# EAGLE board robot_board (EAGLE 6.5.0), part 1 of 2
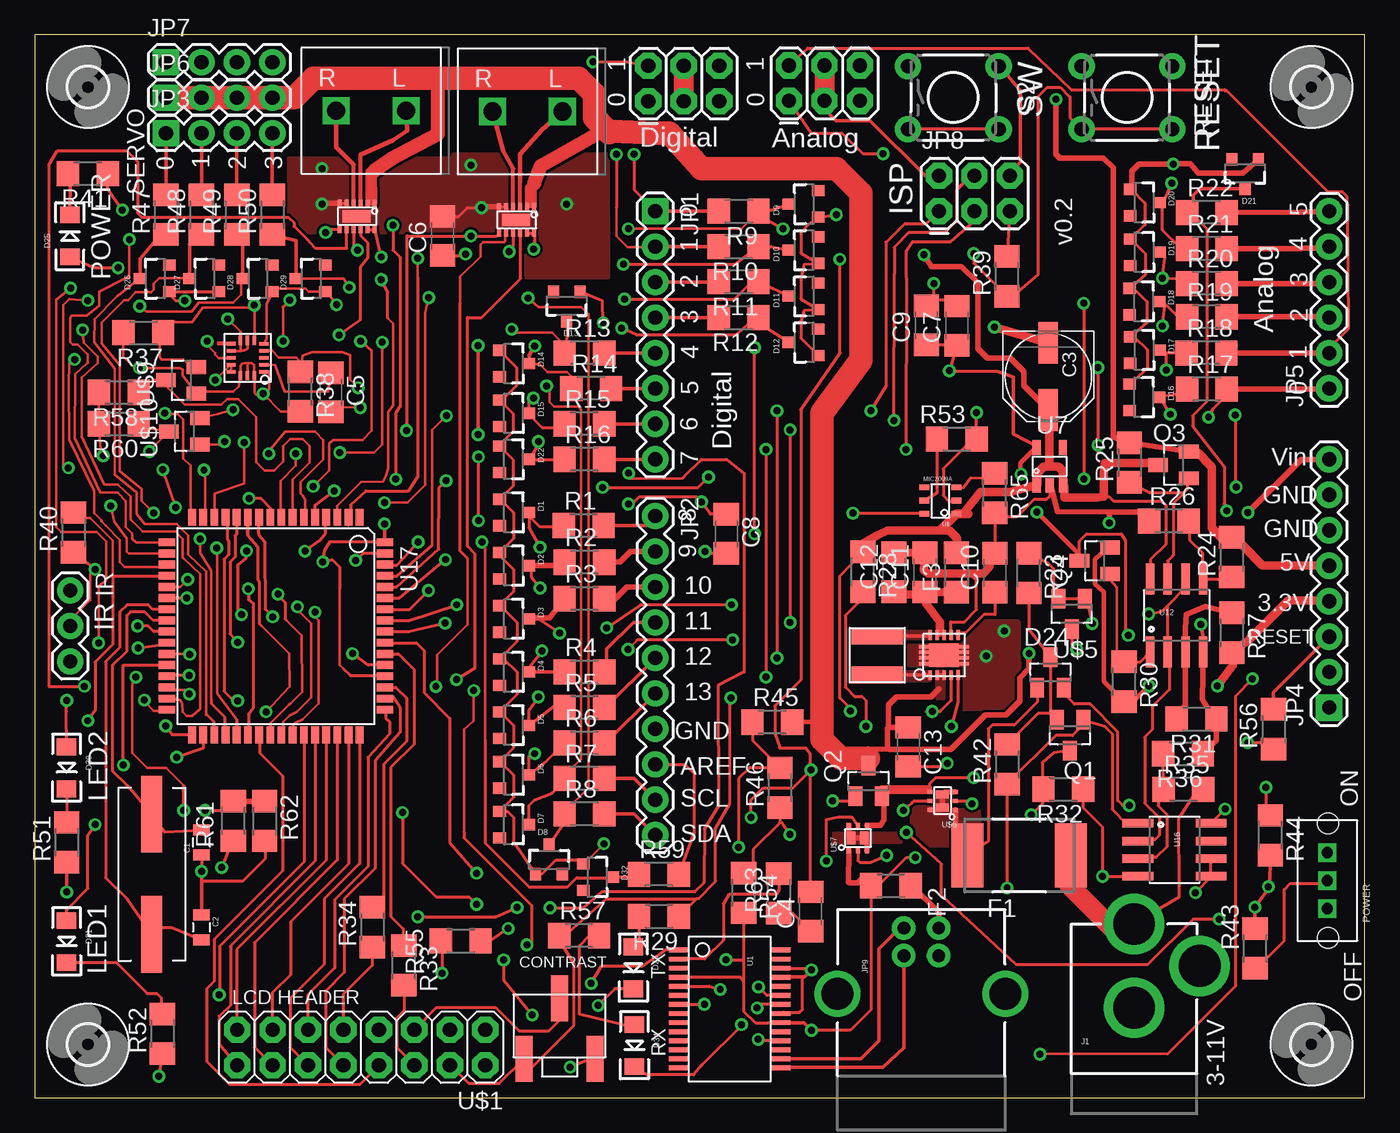
[diagram p0: board, top side]
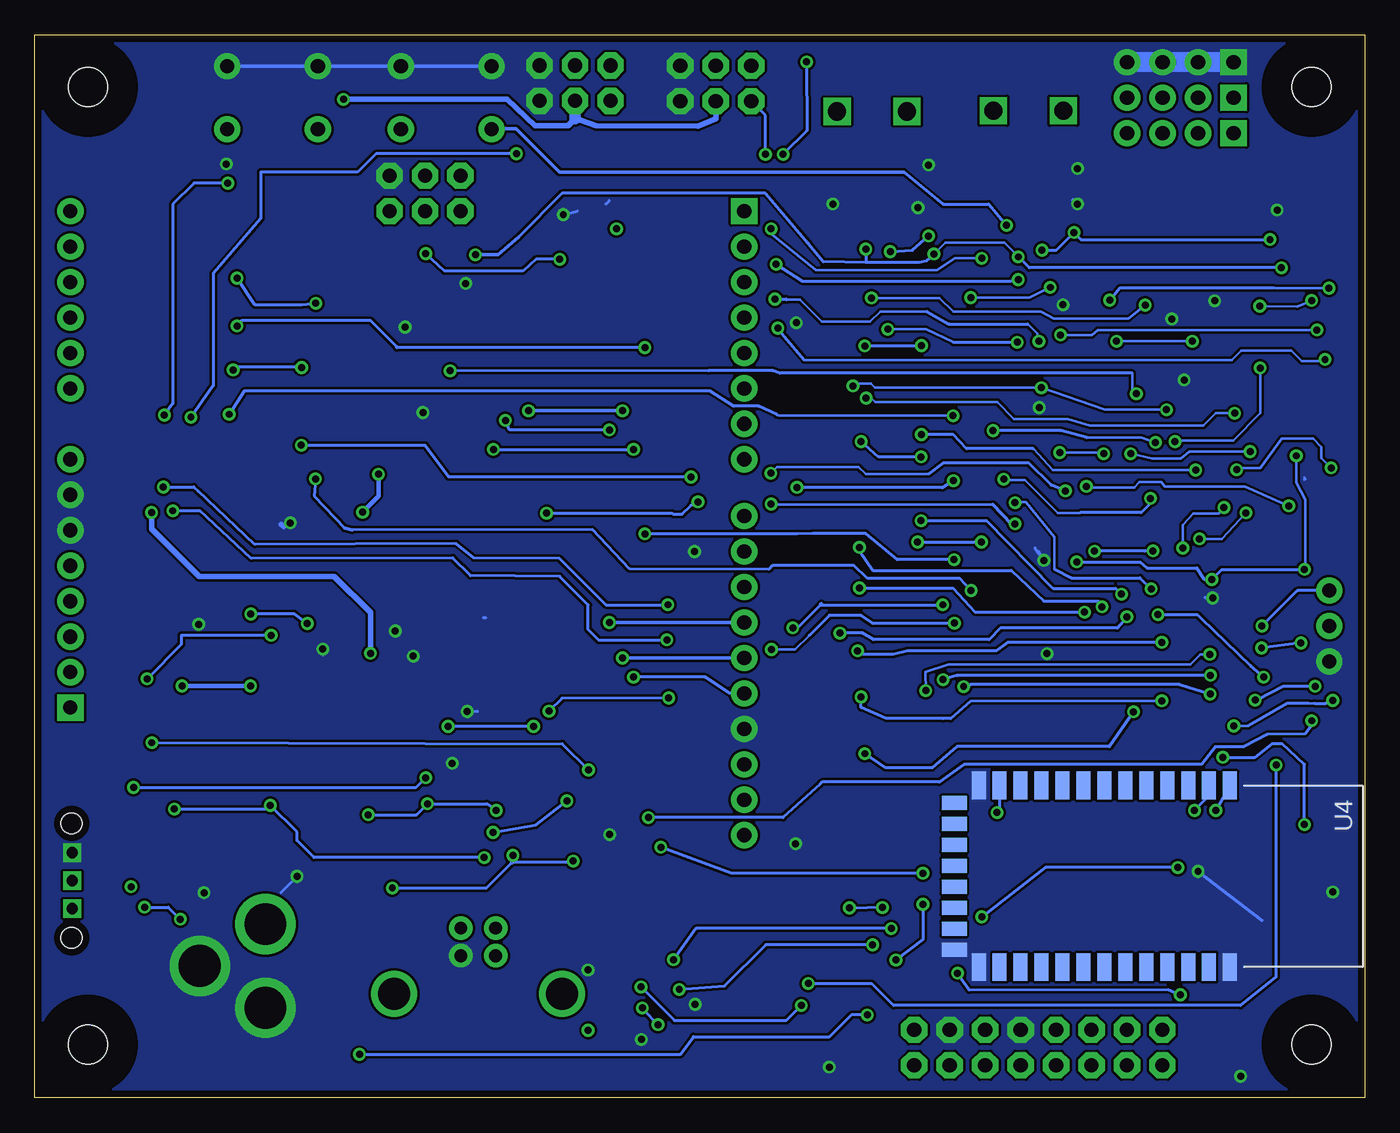
[diagram p1: board, bottom side, seen from below]

Size 95.24 x 76.12 mm. Coordinates in mm from the lower left corner, seen from the top.
Outline: 95.24,0 95.24,76.12 0,76.12 0,0 95.24,0
Copper layers (1*16): Top 0.035mm / dielectric 1.5mm / Bottom 0.035mm
Design rules "default *": minimum track width 7mil, minimum drill 19mil, track to track 7mil, track to pad 8mil, pad to pad 8mil, via to via 8mil, smd to smd 1mil, copper to edge 20mil, drill to drill 8mil, minimum pad ring 10mil, minimum via ring 8mil, stop-mask expansion 4mil, vias tented up to drill 0mil, thermal gap 10mil

## Footprints (pad centres in the part's own frame; a part is rotated, then mirrored left to right if it is on the bottom)
0805 = smd 0.8 x 1.2: 1 -0.9,0; 2 0.9,0
PANASONIC_D = smd 3 x 1.4: + 2.4,0; - -2.4,0
C1206 = smd 1.6 x 1.8: 1 -1.4,0; 2 1.4,0
SOT23-3 = smd 0.8 x 0.9: 1 -0.95,-1; 2 0.95,-1; 3 0,1.1
LED-1206 = smd 1.2 x 1.4: A -1.5,0; C 1.5,0
SOT23 = smd 1 x 1.4: 1 -0.95,-1.1; 2 0.95,-1.1; 3 0,1.1
SMD050F = smd 2.3 x 4.6: 1 -3.7,0; 2 3.7,0
R1206 = smd 1.6 x 1.803: 1 -1.422,0; 2 1.422,0
2,8 = hole 2.8: 0,0
1X03 = drill 1.016 pad 1.88: 1 0,0; 2 2.54,0; 3 5.08,0
POWER_JACK_PTH = drill 2.997 pad 4.318: GND 0,7.7; GNDBREAK 4.7,10.7; PWR 0,13.7
1X08 = drill 1.016 pad 1.88 square: 1 0,0 | drill 1.016 pad 1.88: 2 2.54,0; 3 5.08,0; 4 7.62,0; 5 10.16,0; 6 12.7,0; 7 15.24,0; 8 17.78,0
1X10 = drill 1.016 pad 1.88: 1 0,0; 2 2.54,0; 3 5.08,0; 4 7.62,0; 5 10.16,0; 6 12.7,0; 7 15.24,0; 8 17.78,0; 9 20.32,0; 10 22.86,0
1X04 = drill 1.016 pad 1.88 square: 1 0,0 | drill 1.016 pad 1.88: 2 2.54,0; 3 5.08,0; 4 7.62,0
1X06 = drill 1.016 pad 1.88: 1 0,0; 2 2.54,0; 3 5.08,0; 4 7.62,0; 5 10.16,0; 6 12.7,0
2X3 = drill 1.016 pad 1.88 octagon: 1 0,0; 2 0,2.54; 3 2.54,0; 4 2.54,2.54; 5 5.08,0; 6 5.08,2.54
USB-B-PTH = drill 0.914 pad 1.676: D+ 0,1.25; D- 1.981,1.25; GND 0,-1.25; VBUS 1.981,-1.25 | drill 2.286: S1 -2.718,-6.02; S2 -2.718,6.02
SW = drill 0.8 square: P$1 0,0; P$2 2,0; P$3 -2,0 | hole 1.5: -4.1,-0.04; 4.1,-0.04
SOT23@1 = smd 1 x 1.4: 1 -0.95,-1.1; 2 0.95,-1.1; 3 0,1.1
TACTILE-PTH = drill 1.016 pad 1.88: 1 -3.251,2.261; 2 3.251,2.261; 3 -3.251,-2.261; 4 3.251,-2.261
SSOP28DB = smd 0.348 x 1.397: 1 -4.225,-3.656; 2 -3.575,-3.656; 3 -2.925,-3.656; 4 -2.275,-3.656; 5 -1.625,-3.656; 6 -0.975,-3.656; 7 -0.325,-3.656; 8 0.325,-3.656; 9 0.975,-3.656; 10 1.625,-3.656; 11 2.275,-3.656; 12 2.925,-3.656; 13 3.575,-3.656; 14 4.225,-3.656; 15 4.225,3.656; 16 3.575,3.656; 17 2.925,3.656; 18 2.275,3.656; 19 1.625,3.656; 20 0.975,3.656; 21 0.325,3.656; 22 -0.325,3.656; 23 -0.975,3.656; 24 -1.625,3.656; 25 -2.275,3.656; 26 -2.925,3.656; 27 -3.575,3.656; 28 -4.225,3.656
BLUETOOTH_SMD = smd 2 x 1: 1 0,0; 2 0,-1.5; 3 0,-3; 4 0,-4.5; 5 0,-6; 6 0,-7.5; 7 0,-9; 8 0,-10.5; 9 0,-12; 10 0,-13.5; 11 0,-15; 12 0,-16.5; 13 0,-18; 22 13,-18; 23 13,-16.5; 24 13,-15; 25 13,-13.5; 26 13,-12; 27 13,-10.5; 28 13,-9; 29 13,-7.5; 30 13,-6; 31 13,-4.5; 32 13,-3; 33 13,-1.5; 34 13,0 | smd 1 x 1.8: 14 1.25,-19.75; 15 2.75,-19.75; 16 4.25,-19.75; 17 5.75,-19.75; 18 7.25,-19.75; 19 8.75,-19.75; 20 10.25,-19.75; 21 11.75,-19.75
SOT-23-5 = smd 1.05 x 0.6: P$1 0.53,2.24; P$2 0.53,1.29; P$3 0.53,0.34; P$4 3.23,2.24; P$5 3.23,0.35
SOT23-M5 = smd 0.4 x 0.7: P$1 -0.62,-0.35; P$2 0.33,-0.35; P$3 1.28,-0.35; P$4 1.28,1.94; P$5 0.33,1.94; P$6 -0.62,1.94
PWSON-N12 = smd 2 x 0.9: GND 0.82,0.63 | smd 0.28 x 0.5: P$1 -0.46,-0.32; P$2 0.04,-0.32; P$3 0.54,-0.32; P$4 1.04,-0.32; P$5 1.54,-0.32; P$6 2.04,-0.32; P$7 -0.46,1.58; P$8 0.04,1.58; P$9 0.54,1.58; P$10 1.04,1.58; P$11 1.54,1.58; P$12 2.04,1.58
SO08 = smd 0.61 x 2.21: 1 -1.905,-2.616; 2 -0.635,-2.616; 3 0.635,-2.616; 4 1.905,-2.616; 5 1.905,2.616; 6 0.635,2.616; 7 -0.635,2.616; 8 -1.905,2.616
TQFP64 = smd 1.194 x 0.559: 1 -7.8,6; 2 -7.8,5.2; 3 -7.8,4.4; 4 -7.8,3.6; 5 -7.8,2.8; 6 -7.8,2; 7 -7.8,1.2; 8 -7.8,0.4; 9 -7.8,-0.4; 10 -7.8,-1.2; 11 -7.8,-2; 12 -7.8,-2.8; 13 -7.8,-3.6; 14 -7.8,-4.4; 15 -7.8,-5.2; 16 -7.8,-6; 33 7.8,-6; 34 7.8,-5.2; 35 7.8,-4.4; 36 7.8,-3.6; 37 7.8,-2.8; 38 7.8,-2; 39 7.8,-1.2; 40 7.8,-0.4; 41 7.8,0.4; 42 7.8,1.2; 43 7.8,2; 44 7.8,2.8; 45 7.8,3.6; 46 7.8,4.4; 47 7.8,5.2; 48 7.8,6 | smd 0.559 x 1.194: 17 -6,-7.8; 18 -5.2,-7.8; 19 -4.4,-7.8; 20 -3.6,-7.8; 21 -2.8,-7.8; 22 -2,-7.8; 23 -1.2,-7.8; 24 -0.4,-7.8; 25 0.4,-7.8; 26 1.2,-7.8; 27 2,-7.8; 28 2.8,-7.8; 29 3.6,-7.8; 30 4.4,-7.8; 31 5.2,-7.8; 32 6,-7.8; 49 6,7.8; 50 5.2,7.8; 51 4.4,7.8; 52 3.6,7.8; 53 2.8,7.8; 54 2,7.8; 55 1.2,7.8; 56 0.4,7.8; 57 -0.4,7.8; 58 -1.2,7.8; 59 -2,7.8; 60 -2.8,7.8; 61 -3.6,7.8; 62 -4.4,7.8; 63 -5.2,7.8; 64 -6,7.8
2X8 = drill 1.016 pad 1.88 octagon: 1 0,0; 2 0,2.54; 3 2.54,0; 4 2.54,2.54; 5 5.08,0; 6 5.08,2.54; 7 7.62,0; 8 7.62,2.54; 9 10.16,0; 10 10.16,2.54; 11 12.7,0; 12 12.7,2.54; 13 15.24,0; 14 15.24,2.54; 15 17.78,0; 16 17.78,2.54
POT = smd 1.194 x 3.302: 1 -2.54,0; 2 0,4.318; 3 2.54,0
WSON-10 = smd 0.7 x 0.25: GND@N1 -1.43,0.6; GND@N2 -1.43,0.2; GND@N3 -1.43,-0.2; GND@N4 -1.43,-0.6; GND@N5 1.43,0.6; GND@N6 1.43,0.2; GND@N7 1.43,-0.2; GND@N8 1.43,-0.6 | smd 0.25 x 0.7: P$1 -1,-1.44; P$2 -0.5,-1.44; P$3 0,-1.44; P$4 0.5,-1.44; P$5 1,-1.43; P$6 1,1.44; P$7 0.5,1.44; P$8 0,1.44; P$9 -0.5,1.44; P$10 -1,1.44 | smd 2.16 x 1.7: P$11 0,0
TAIYO4012 = smd 1.2 x 3.7: P$1 1.4,0; P$2 -1.4,0
SC70T = smd 0.3 x 0.35: D1@1 -0.65,0.89; D2@1 0.65,-0.94; G1 0,-0.94; G2 0,0.89; S1 -0.65,-0.94; S2 0.65,0.89 | smd 0.6 x 0.95: D1@2 -0.47,-0.02; D2@2 0.46,-0.02
QFN-COL = smd 0.67 x 0.25: P$1 -1.17,0.99; P$2 -1.17,0.49; P$3 -1.17,-0.01; P$4 -1.17,-0.51; P$5 -1.17,-1.01; P$9 1.17,-1; P$10 1.17,-0.5; P$11 1.17,0; P$12 1.17,0.5; P$13 1.17,1 | smd 0.25 x 0.67: P$6 -0.5,-1.26; P$7 0,-1.26; P$8 0.5,-1.26; P$14 0.5,1.26; P$15 0,1.26; P$16 -0.5,1.26
2POS_TERMINAL = drill 1.3 square: L -5,0; R 0,0
CRYSTAL-SMD-10.5X4.8-2PIN = smd 5.5 x 1.5: P$1 -4.3,0; P$2 4.3,0

## Placement (x,y rotation side)
C1  22pF  [0805]  11.93,18.29 90 top
C2  22pF  [0805]  11.93,12.19 270 top
C3  100uF  [PANASONIC_D]  72.58,51.66 270 top
C4  .1uF  [C1206]  55.57,13.34 90 top
C5  .1uF  [C1206]  21.2,50.52 270 top
C6  .1uF  [C1206]  29.2,61.72 90 top
C7  22uF  [C1206]  66.03,55.3 90 top
C8  .1uF  [C1206]  49.52,40.39 270 top
C9  1uF  [C1206]  63.85,55.32 90 top
C10  .1uF  [C1206]  68.75,37.59 90 top
C11  22uF  [C1206]  63.74,37.62 90 top
C12  22uF  [C1206]  61.53,37.64 90 top
C13  22uF  [C1206]  62.55,25.12 270 top
D1  5.1V  [SOT23-3]  34.28,41.91 270 top
D2  5.1V  [SOT23-3]  34.28,38.1 270 top
D3  5.1V  [SOT23-3]  34.28,34.29 270 top
D4  5.1V  [SOT23-3]  34.28,30.48 270 top
D5  5.1V  [SOT23-3]  34.28,26.67 270 top
D6  5.1V  [SOT23-3]  34.28,23.11 270 top
D7  5.1V  [SOT23-3]  34.28,19.56 270 top
D8  5.1V  [SOT23-3]  36.82,17.02 0 top
D9  5.1V  [SOT23-3]  55.11,64.01 90 top
D10  5.1V  [SOT23-3]  55.11,60.71 90 top
D11  5.1V  [SOT23-3]  55.11,57.4 90 top
D12  5.1V  [SOT23-3]  55.11,54.1 90 top
D13  5.1V  [SOT23-3]  38.09,56.72 180 top
D14  5.1V  [SOT23-3]  34.28,52.58 270 top
D15  5.1V  [SOT23-3]  34.28,49.02 270 top
D16  5.1V  [SOT23-3]  79.42,50.16 270 top
D17  5.1V  [SOT23-3]  79.44,53.54 270 top
D18  5.1V  [SOT23-3]  79.42,57.02 270 top
D19  5.1V  [SOT23-3]  79.44,60.55 270 top
D20  5.1V  [SOT23-3]  79.44,64.11 270 top
D21  5.1V  [SOT23-3]  86.68,66.19 180 top
D22  5.1V  [SOT23-3]  34.28,45.72 270 top
D23  RX  [LED-1206]  42.87,9.3 270 top
D24  BAT54C  [SOT23]  72.74,30.45 0 top
D25  POWER  [LED-1206]  2.5,61.72 90 top
D26  5.1V  [SOT23-3]  8.63,58.67 90 top
D27  5.1V  [SOT23-3]  12.18,58.67 90 top
D28  5.1V  [SOT23-3]  15.99,58.67 90 top
D29  5.1V  [SOT23-3]  19.8,58.67 90 top
D30  GREEN  [LED-1206]  2.28,23.62 270 top
D31  YELLOW  [LED-1206]  2.28,11.18 270 top
D32  5.1V  [SOT23-3]  40.27,15.8 270 top
D34  RX  [LED-1206]  42.94,3.73 270 top
F1  2920L200  [SMD050F]  70.5,17.35 180 top
F2  1206PPTC_FUSE  [R1206]  61.31,15.19 180 top
F3  1206PPTC_FUSE  [R1206]  66,37.62 90 top
H1  MOUNT-HOLE2.8  [2,8]  3.8,3.81 90 top
H2  MOUNT-HOLE2.8  [2,8]  3.8,72.39 90 top
H3  MOUNT-HOLE2.8  [2,8]  91.43,3.81 90 top
H4  MOUNT-HOLE2.8  [2,8]  91.43,72.39 90 top
IR  [1X03]  2.53,36.32 270 top
J1  POWER_JACKPTH  [POWER_JACK_PTH]  78.73,-1.27 0 top
JP1  [1X08]  44.44,63.5 270 top
JP2  M10"  [1X10]  44.44,41.66 270 top
JP3  [1X04]  9.39,69.09 0 top
JP4  [1X08]  92.7,27.94 90 top
JP5  [1X06]  92.7,50.8 90 top
JP6  [1X04]  9.39,71.63 0 top
JP7  [1X04]  9.39,74.17 0 top
JP8  [2X3]  64.76,63.5 0 top
JP9  USB-B  [USB-B-PTH]  63.49,10.16 90 top
JP10  [2X3]  54.02,71.4 0 top
JP11  [2X3]  43.93,71.37 0 top
POWER  SW  [SW]  92.57,15.54 90 top
Q1  DMP2035U  [SOT23]  74.13,25.96 180 top
Q2  DMP2035U  [SOT23]  59.71,22.68 0 top
Q3  DMP2035U-7  [SOT23@1]  81.55,45.31 90 top
Q4  DMP2035U-7  [SOT23@1]  75.91,38.46 90 top
R1  300  [R1206]  39.31,40.97 0 top
R2  300  [R1206]  39.36,38.35 0 top
R3  300  [R1206]  39.36,35.74 0 top
R4  300  [R1206]  39.36,30.48 0 top
R5  300  [R1206]  39.36,27.94 0 top
R6  300  [R1206]  39.36,25.4 0 top
R7  300  [R1206]  39.36,22.86 0 top
R8  300  [R1206]  39.36,20.32 0 top
R9  300  [R1206]  50.41,63.5 180 top
R10  300  [R1206]  50.41,60.96 180 top
R11  300  [R1206]  50.41,58.45 180 top
R12  300  [R1206]  50.41,55.88 180 top
R13  300  [R1206]  39.36,53.34 0 top
R14  300  [R1206]  39.84,50.8 0 top
R15  300  [R1206]  39.36,48.26 0 top
R16  300  [R1206]  39.36,45.72 0 top
R17  300  [R1206]  83.94,50.75 0 top
R18  300  [R1206]  83.91,53.34 0 top
R19  300  [R1206]  83.94,55.93 0 top
R20  300  [R1206]  83.94,58.32 0 top
R21  300  [R1206]  83.94,60.81 0 top
R22  300  [R1206]  83.94,63.4 0 top
R23  10K 1%  [R1206]  71.19,37.57 270 top
R24  24K 1%  [R1206]  85.71,38.71 90 top
R25  20K 1%  [R1206]  78.4,45.49 90 top
R26  20K 1%  [R1206]  81.22,41.3 0 top
R27  10K 1%  [R1206]  85.74,33.3 270 top
R28  1M  [R1206]  59.3,37.67 270 top
R29  330  [R1206]  44.69,12.98 180 top
R30  20K 1%  [R1206]  78.02,29.79 270 top
R31  24K 1%  [R1206]  83.2,27.13 180 top
R32  20K 1%  [R1206]  73.65,22.1 180 top
R33  300  [R1206]  26.43,9.47 270 top
R34  300  [R1206]  24.17,12.22 90 top
R35  120K 1%  [R1206]  82.26,22.07 0 top
R36  600K 1%  [R1206]  82.24,24.64 180 top
R37  10K 1%  [R1206]  7.76,54.79 180 top
R38  10K 1%  [R1206]  19.01,50.57 270 top
R39  1K  [R1206]  69.61,58.83 90 top
R40  10K 1%  [R1206]  2.76,40.49 90 top
R41  330  [R1206]  3.8,66.19 180 top
R42  10K 1%  [R1206]  69.64,23.88 90 top
R43  1K  [R1206]  87.39,10.69 270 top
R44  100K  [R1206]  88.48,18.8 270 top
R45  10K 1%  [R1206]  52.82,26.9 0 top
R46  10K 1%  [R1206]  53.36,22.2 90 top
R47  300  [R1206]  9.39,63.25 90 top
R48  300  [R1206]  11.93,63.25 90 top
R49  300  [R1206]  14.47,63.25 90 top
R50  300  [R1206]  17.01,63.25 90 top
R51  330  [R1206]  2.28,18.29 90 top
R52  330  [R1206]  9.13,4.57 90 top
R53  1.5K  [R1206]  66.03,47.17 180 top
R54  10K 1%  [R1206]  50.76,14.66 270 top
R55  1K  [R1206]  30.5,11.23 180 top
R56  1K  [R1206]  88.71,26.39 90 top
R57  330  [R1206]  38.98,11.61 0 top
R58  10K 1%  [R1206]  6.01,50.52 180 top
R59  1K  [R1206]  44.69,16 0 top
R60  10K 1%  [R1206]  6.01,48.26 180 top
R61  1K  [R1206]  14.21,19.81 270 top
R62  2K  [R1206]  16.45,19.81 90 top
R63  1K  [R1206]  53.28,14.63 90 top
R65  1K  [R1206]  68.75,43.31 270 top
RESET  [TACTILE-PTH]  78.22,71.63 0 top
S2  [TACTILE-PTH]  65.78,71.63 0 top
U1  FT232RL-BASICSSOP  [SSOP28DB]  49.77,6.35 270 top
U4  HC_05  [BLUETOOTH_SMD]  9.64,22.35 270 bottom
U7  TLV70233  [SOT-23-5]  73.98,43.33 90 top
U8  MIC2009A  [SOT23-M5]  65.65,42.44 90 top
U9  DRV8839  [PWSON-N12]  35.3,63.5 180 top
U10  DRV8839  [PWSON-N12]  23.87,63.75 180 top
U12  LM393  [SO08]  81.78,34.54 0 top
U16  LM393  [SO08]  81.63,17.75 270 top
U17  ATMEGA325PA  [TQFP64]  17.26,33.78 270 top
U$1  M08X2  [2X8]  32.26,4.86 180 top
U$2  POT  [POT]  37.58,2.79 0 top
U$3  TPS63061  [WSON-10]  65.12,31.7 0 top
U$4  1uH  [TAIYO4012]  60.34,31.67 270 top
U$5  AP431SAG-7  [SOT23]  74.26,34.65 180 top
U$6  SIA907EDJT  [SC70T]  64.99,21.26 90 top
U$7  SIA907EDJT  [SC70T]  58.94,18.62 0 top
U$8  MMA8453Q  [QFN-COL]  15.23,52.98 180 top
U$9  BSS138  [SOT23]  10.48,51.38 90 top
U$10  BSS138  [SOT23]  10.71,47.73 90 top
U$19  2POS_TERMINAL  [2POS_TERMINAL]  32.78,70.64 180 top
U$20  2POS_TERMINAL  [2POS_TERMINAL]  21.58,70.69 180 top
Y1  16MHz  [CRYSTAL-SMD-10.5X4.8-2PIN]  8.37,16 270 top

## Library data of the parts
C1 C2 = SparkFun-Passives
C3 = SparkFun-Capacitors
C4-C13 R1-R63 R65 = resistor
D1-D22 D26-D29 D32 = SparkFun-DiscreteSemi
D23 D25 D30 D31 D34 = SparkFun-LED; PROD_ID: DIO-09910
D24 = diode
F1-F3 Q1-Q4 U7-U10 U17 U$3-U$10 = jseng
H1-H4 = holes
IR JP1-JP8 JP10 JP11 U$1 = SparkFun-Connectors
J1 = SparkFun-Connectors; PROD_ID: PRT-00119
JP9 = SparkFun-Connectors; PROD_ID: CONN-08278
POWER U$2 U$19 U$20 = r_cubed
RESET S2 = SparkFun-Electromechanical
U1 = SparkFun-DigitalIC
U4 = SerialPortBluetooth
U12 U16 = SparkFun-AnalogIC
Y1 = SparkFun-FreqCtrl

## Nets
2.5V: R23.1 U12.2 U12.6 U16.2 U$5.1 U$5.2
3V3: C7.1 C9.1 Q4.3 R37.2 R38.2 U4.12 U7.P$4 U$8.P$1 U$8.P$14 U$8.P$15 U$8.P$16 U$9.1 U$10.1
3V3_OUT: JP4.4 Q4.2 R27.2 R30.2
5V: C3.+ C6.1 D25.A F3.2 Q3.3 R28.1 R29.1 R57.1 U7.P$1 U7.P$3 U8.P$1 U9.P$7 U9.P$8 U10.P$7 U10.P$8 U12.8 U$1.4 U$2.1
5V_OUT: JP4.5 JP8.2 JP10.3 JP10.4 JP11.3 JP11.4 Q3.2 R24.2 R25.2
5V_UC: C8.1 IR.2 R40.1 R58.2 R60.2 U8.P$6 U17.21 U17.52 U17.64
A0: JP5.1 JP10.1 R17.2
A0_IN: D16.3 R17.1 U17.61
A1: JP5.2 JP10.2 R18.2
A1_IN: D17.3 R18.1 U17.60
A2: JP5.3 R19.2
A2_IN: D18.3 R19.1 U17.59
A3: JP5.4 R20.2
A3_IN: D19.3 R20.1 U17.58
A4: JP5.5 R21.2
A4_IN: D20.3 R21.1 U17.57
A5: JP5.6 R22.2
A5_IN: D21.3 R22.1 U17.56
ACCEL_INT: U17.26 U$8.P$11
AOUT1: U9.P$3 U$19.L
AOUT2: U9.P$4 U$19.R
AREF: JP2.8 R59.2
AREF_IN: D32.3 R59.1 U17.62
BOUT1: U10.P$3 U$20.L
BOUT2: U10.P$4 U$20.R
BT_RX: R61.2 U17.5
BT_TX: U4.1 U17.4
D0: JP1.1 JP11.1 R9.2
D0_IN: D9.3 R9.1 U17.2
D1: JP1.2 JP11.2 R10.2
D1_IN: D10.3 R10.1 U17.3
D2: JP1.3 R11.2
D2_IN: D11.3 R11.1 U17.18
D3: JP1.4 R12.2
D3_IN: D12.3 R12.1 U17.19
D4: JP1.5 R13.2
D4_IN: D13.3 R13.1 U17.8
D5: JP1.6 R14.2
D5_IN: D14.3 R14.1 U17.15
D6: JP1.7 R15.2
D6_IN: D15.3 R15.1 U17.16
D7: JP1.8 R16.2
D7_IN: D22.3 R16.1 U17.40
D8: JP2.1 R1.2
D8_IN: D1.3 R1.1 U17.41
D9: JP2.2 R2.2
D9_IN: D2.3 R2.1 U17.42
D10: JP2.3 R3.2
D11: JP2.4 JP8.4 R4.2
D12: JP2.5 JP8.1 R5.2
D13: JP2.6 JP8.3 R6.2
DTR: C4.1 R63.1
E: U17.39 U$1.8
GND: C1.1 C2.1 C3.- C5.2 C6.2 C7.2 C8.2 C9.2 C10.2 C11.2 C12.2 C13.2 D1.1 D2.1 D3.1 D4.1 D5.1 D6.1 D7.1 D8.1 D9.1 D10.1 D11.1 D12.1 D13.1 D14.1 D15.1 D16.1 D17.1 D18.1 D19.1 D20.1 D21.1 D22.1 D26.1 D27.1 D28.1 D29.1 D32.1 IR.3 J1.GND J1.GNDBREAK JP2.7 JP4.6 JP4.7 JP7.1 JP7.2 JP7.3 JP7.4 JP8.6 JP9.GND JP10.5 JP10.6 JP11.5 JP11.6 POWER.P$2 R26.1 R31.1 R32.1 R36.1 R41.1 R46.1 R51.1 R52.1 R53.1 R54.1 R62.1 R65.2 RESET.1 RESET.2 S2.1 S2.2 U1.7 U1.18 U1.21 U1.25 U1.26 U4.13 U4.21 U4.22 U4.34 U7.P$2 U8.P$2 U9.GND U9.P$5 U9.P$6 U10.GND U10.P$5 U10.P$6 U12.4 U16.4 U16.5 U16.6 U17.22 U17.53 U17.63 U$1.3 U$1.7 U$2.3 U$3.GND@N1 U$3.GND@N2 U$3.GND@N3 U$3.GND@N4 U$3.GND@N5 U$3.GND@N6 U$3.GND@N7 U$3.GND@N8 U$3.P$4 U$3.P$7 U$3.P$11 U$5.3 U$8.P$5 U$8.P$7 U$8.P$8 U$8.P$10 U$8.P$12 U$8.P$13
IR: IR.1 U17.25
LCD0: R34.2 U17.51
LCD1: U17.50 U$1.10
LCD2: U17.49 U$1.11
LCD3: U17.48 U$1.12
LCD4: U17.47 U$1.13
LCD5: U17.46 U$1.14
LCD6: U17.45 U$1.15
LCD7: U17.44 U$1.16
LED0: D30.A U17.33
LED1: D31.A U17.34
M0_DIR0: U9.P$9 U17.29
M0_DIR1: U9.P$11 U17.30
M0_EN: U9.P$10 U9.P$12 U17.14
M1_DIR0: U10.P$9 U17.31
M1_DIR1: U10.P$11 U17.32
M1_EN: U10.P$10 U10.P$12 U17.17
MISO: D5.3 R5.1 U17.13
MOSI: D4.3 R4.1 U17.12
N$1: JP9.D- U1.16
N$2: JP9.D+ U1.15
N$3: C2.2 U17.23 Y1.P$2
N$4: C1.2 U17.24 Y1.P$1
N$5: R53.2 U8.P$5
N$6: R55.2 U17.43
N$7: JP4.3 R56.2
N$8: C5.1 U$8.P$2
N$9: F2.1 JP9.VBUS
N$10: D34.C U1.22
N$11: D34.A R57.2
N$12: D23.A R29.2
N$13: R61.1 R62.2 U4.2
N$14: R63.2 U1.2
N$15: U$1.5 U$2.2
N$16: R28.2 U$3.P$5
N$17: R65.1 U8.P$3
N$18: D24.3 Q1.2 R23.2 R42.2
N$19: C10.1 U$3.P$6
N$20: U$3.P$1 U$4.P$1
N$21: U$3.P$10 U$4.P$2
N$22: D23.C U1.23
N$23: U$7.D1@1 U$7.D1@2 U$7.D2@1 U$7.D2@2
N$24: U$6.D1@1 U$6.D1@2 U$6.D2@1 U$6.D2@2
N$25: R33.2 U$1.6
N$26: R34.1 U$1.9
N$30: Q3.1 R25.1 U12.7
N$34: R24.1 R26.2 U12.5
N$38: R27.1 R31.2 U12.3
N$39: R35.1 R36.2 U16.3
N$41: D25.C R41.2
N$43: POWER.P$1 R43.2
N$45: Q4.1 R30.1 U12.1
N$46: JP8.5 R39.2
N$51: Q2.1 R43.1 R44.2
N$52: R45.1 R46.2 U17.55
N$57: D30.C R51.2
N$62: D31.C R52.2
PWR_GATE: Q1.3 R32.2 U$6.G1 U$6.G2
PWR_SW: Q2.2 R44.1 U$6.S2 U$7.S2
RESET: C4.2 R39.1 R40.2 R56.1 RESET.3 RESET.4 U17.20
RS: R33.1 U17.54
RX: U1.1 U17.28
SCK: D6.3 R6.1 U17.11
SCL0: JP2.9 R7.2
SCL_5V: R60.1 U17.6 U$10.3
SCL_IN: D7.3 R7.1 R38.1 U$8.P$4 U$10.2
SDA0: JP2.10 R8.2
SDA_5V: R58.1 U17.7 U$9.3
SDA_IN: D8.3 R8.1 R37.1 U$8.P$6 U$9.2
SERVO0: JP3.1 R47.2
SERVO0_IN: D26.3 R47.1 U17.35
SERVO1: JP3.2 R48.2
SERVO1_IN: D27.3 R48.1 U17.36
SERVO2: JP3.3 R49.2
SERVO2_IN: D28.3 R49.1 U17.37
SERVO3: JP3.4 R50.2
SERVO3_IN: D29.3 R50.1 U17.38
SS: D3.3 R3.1 U17.10
SW1: S2.3 S2.4 U17.9
TX: U1.5 U17.27
USB_5V: D24.2 F2.2 R54.2 R55.1 U1.4 U1.20 U16.8 U$7.S1
USBGATE: Q1.1 R42.1 U16.1 U$7.G1 U$7.G2
VIN: F1.1 J1.PWR R35.2
VIN1: D24.1 F1.2 U$6.S1
VIN_F: C13.1 JP4.8 JP6.1 JP6.2 JP6.3 JP6.4 Q2.3 R45.2 U9.P$1 U9.P$2 U10.P$1 U10.P$2 U$3.P$2 U$3.P$3
VREG_OUT: C11.1 C12.1 F3.1 U$3.P$8 U$3.P$9